# Altium PCB BB8_Control.PcbDoc
Units mil, origin at the board's own origin, x right, y up, seen from the top; angles counter-clockwise.
Board outline 3937.01 x 1968.5 mil, 2 copper layers (Top Layer, Bottom Layer); 63 components, 43 nets, 242 pads, 44 vias.
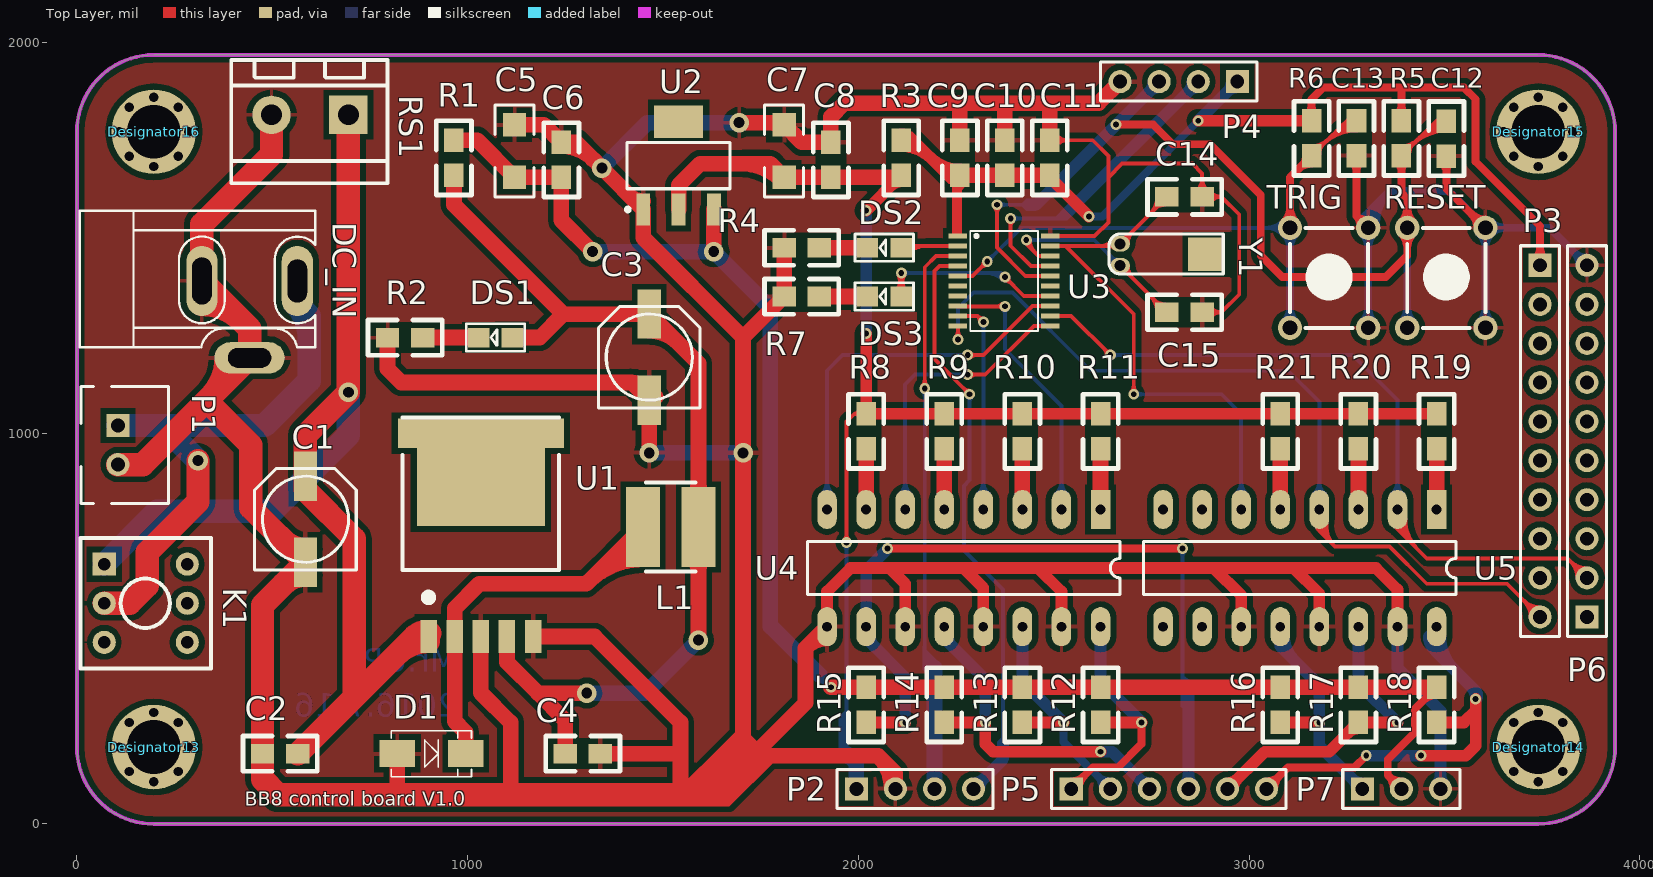
[diagram p0: Top Layer view]
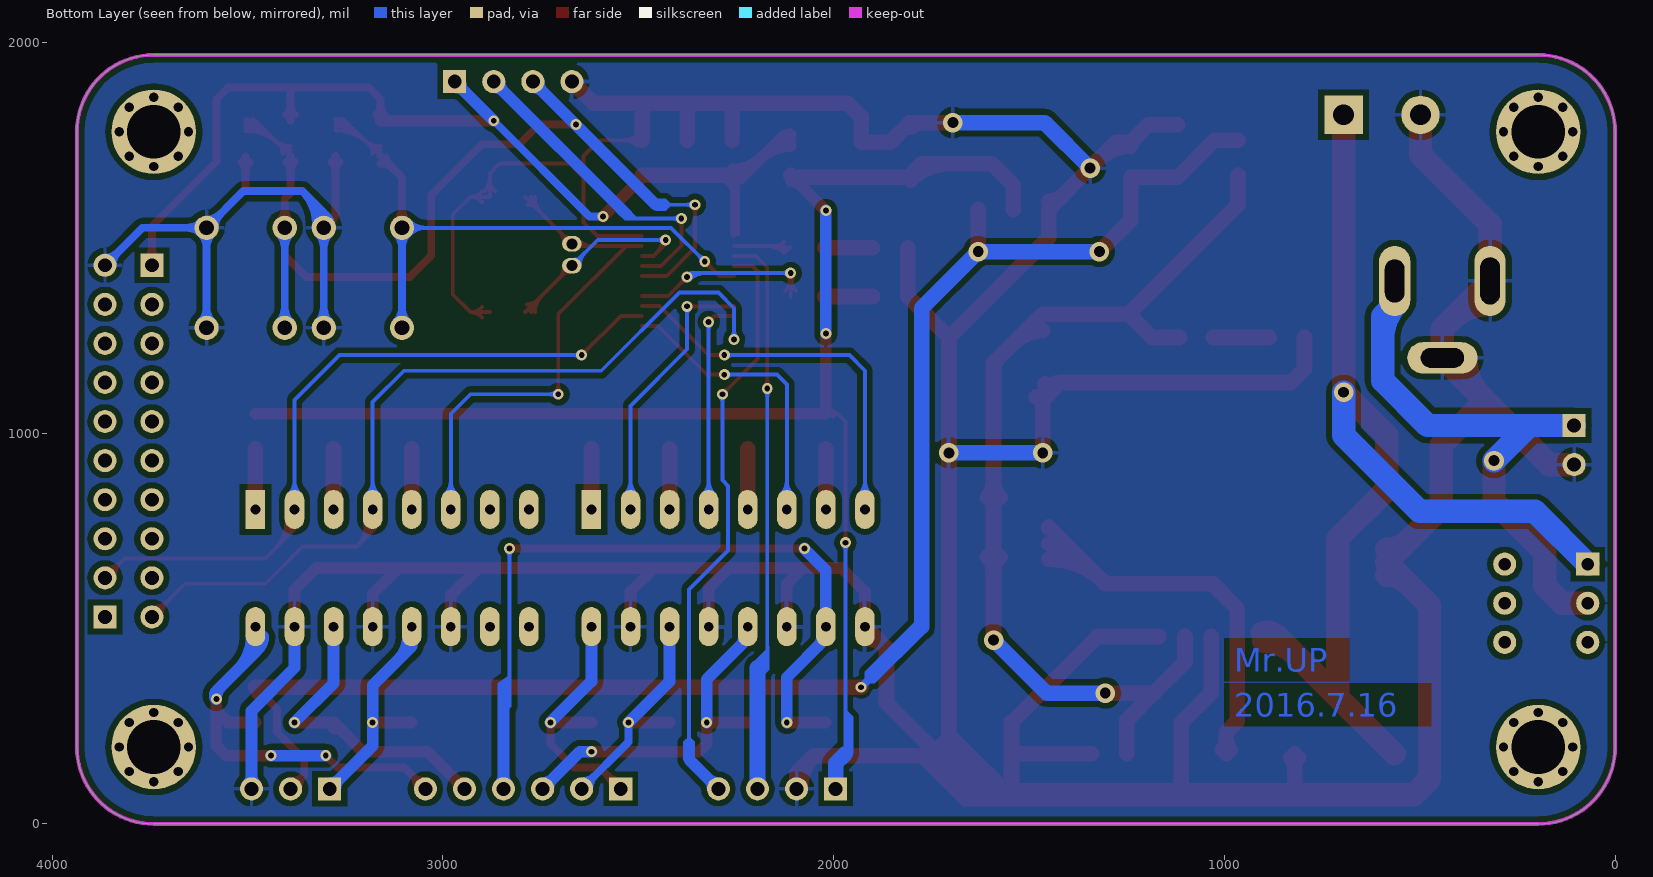
[diagram p1: Bottom Layer view, seen from below]

## Layer stack, top to bottom
Top Layer: signal copper 1.4
Dielectric: dielectric 12.6, FR-4, Dk 4.8
Bottom Layer: signal copper 1.4

## Board outline
196.85,0 cw(c196.85,196.85) 0,196.85 0,1771.65 cw(c196.85,1771.65) 196.85,1968.5 3740.16,1968.5 cw(c3740.16,1771.65) 3937.01,1771.65 3937.01,196.85 cw(c3740.16,196.85) 3740.16,0

## Design rules (kind name [scope] priority, off if disabled: settings)
Clearance polygon [InPolygon] p1: gap=15
Clearance [All] p2: gap=10
PolygonConnect [All] p1: connectstyle=Relief reliefconductorwidth=10 reliefentries=4 polygonreliefangle="90 Angle"
RoutingVias [All] p1: holewidth=15 width=28 viastyle="Through Hole" minholewidth=12 minwidth=20 maxholewidth=50 maxwidth=50
SilkscreenOverComponentPads [All] p1: minsilkscreentomaskgap=10
SolderMaskExpansion [All] p1: expansion=4
Width [All] p1: maxlimit=200 minlimit=10 preferedwidth=10 minimp=50.000000 maximp=50.000000 favimp=50.000000
27 further rules are at their usual default settings.

## Classes and differential pairs
component class Power: C1 C2 C3 C4 C5 C6 C7 C8 C9 C10 C11 D1 DC_IN DS1 K1 L1 P1 R1 R2 R3 RS1 U1 U2
component class MainControl: C12 C13 C14 C15 DS2 DS3 P2 P3 P4 P5 P6 P7 R4 R5 R6 R7 R8 R9 R10 R11 R12 R13 R14 R15 R16 R17 R18 R19 R20 R21 RESET TRIG U3 U4 U5 Y1

## Components (designator, comment, footprint, x,y, rotation, side; value= is the part's Value field where it differs from the comment)
C1 "220uF" CC6.56.5 585,780 r270 top
C2 "104" 0805 475,180.06 r0 top
C3 "220uF" CC6.56.5 1465,1195 r270 top
C4 "104" 0805 1340,180.06 r180 top
C5 "10uF" 1206 1120,1790 r270 top
C6 "104" 0805 1240,1745 r270 top
C7 "10uF" 1206 1810,1790 r270 top
C8 "104" 0805 1930,1745 r270 top
C9 "104" 0805 2260,1750 r270 top
C10 "104" 0805 2375,1750 r270 top
C11 "104" 0805 2490,1750 r270 top
C12 "104" 0805 3505,1709.09 r90 top
C13 "104" 0805 3275,1710 r90 top
C14 "104" 0805 2790,1605 r0 top
C15 "104" 0805 2790,1310 r0 top
D1 "1N5824" DIODE_3*5.3 910,180 r0 top
DC_IN "Charging Port" DC10B 145,1220 r0 top (schematic designator DC_IN1)
Designator13 "Comment" M3-3.5-5.5 196.85,196.85 r0 top
Designator14 "Comment" M3-3.5-5.5 3740.16,196.85 r0 top
Designator15 "Comment" M3-3.5-5.5 3740.16,1771.65 r0 top
Designator16 "Comment" M3-3.5-5.5 196.85,1771.65 r0 top
DS1 "LED1" SMDLED 1115,1245 r180 top
DS2 "LED1" SMDLED 2110,1475 r180 top
DS3 "LED1" SMDLED 2110,1350 r180 top
K1 "BUTTON" BTN8.5*8.5 70,665 r0 top
L1 "33uH" CD54 1449.13,760 r0 top
P1 "DC 7.4V" XH2.54-2P 105,1020 r270 top
P2 "Header 4" HDR1X4 1995,90 r0 top
P3 "Header 10" HDR1X10 3745,1430 r270 top
P4 "Header 4" HDR1X4 2970,1900 r180 top
P5 "Header 6" HDR1X6 2545,90 r0 top
P6 "Header 10" HDR1X10 3865,530 r90 top
P7 "Header 3" HDR1X3 3290,90 r0 top
R1 "0R" 0805 965,1660 r90 top
R2 "1K" 0805 885,1245 r180 top
R3 "0R" 0805 2110,1660 r90 top
R4 "510R" 0805 1900,1475 r180 top
R5 "47K" 0805 3390,1710 r90 top
R6 "47K" 0805 3160,1710 r90 top
R7 "510R" 0805 1900,1350 r180 top
R8 "1K" 0805 2020,960 r90 top
R9 "1K" 0805 2220,960 r90 top
R10 "1K" 0805 2420,960 r90 top
R11 "1K" 0805 2620,960 r90 top
R12 "4.7K" 0805 2619.94,260 r90 top
R13 "4.7K" 0805 2420,260 r90 top
R14 "4.7K" 0805 2220,260 r90 top
R15 "4.7K" 0805 2020,260 r90 top
R16 "4.7K" 0805 3080,260 r90 top
R17 "4.7K" 0805 3280,260 r90 top
R18 "4.7K" 0805 3480,260 r90 top
R19 "1K" 0805 3480,960 r90 top
R20 "1K" 0805 3280,960 r90 top
R21 "1K" 0805 3080,960 r90 top
RESET "KEY_M" KEY_M 3405,1270 r90 top (schematic designator RESET1)
RS1 "to L298N" HEAD2L-0.8 695,1815 r180 top
TRIG "KEY_M" KEY_M 3105,1270 r90 top (schematic designator TRIG1)
U1 "LM2596" TO-263-5 900,480 r90 top
U2 "AMS1117-3.3" SOT223-4L 1540,1685 r90 top
U3 "MSP430G2x53" MSP430G2x53 2255,1505 r0 top
U4 "TLP521-4" DIP16 2620,805 r270 top
U5 "TLP521-4" DIP16 3480,805 r270 top
Y1 "32.768KHz" XTAL32 2670,1485 r0 top

## Footprints (in the part's own frame and the unit in brackets; to place one, negate y for a bottom-side part, rotate by r counter-clockwise, add the part's x,y. Pads: shape width x height; smd on the part's side, far side on the other; paste and mask are expansions set on the pad)
0805 [mil]
  rect 60x50 smd: 1(0,-0.06) 2(90,-0.06)
  silkscreen extent -50,-45 140,45
1206 [mil]
  rect 60x60 smd: 1(0,0) 2(135,0)
  silkscreen extent -50,-50 185,50
BTN8.5*8.5 [mm]
  rect 1.5x1.5 hole 0.8: 1(0,0)
  round 1.5 hole 0.8: 2(0,-2.54) 3(0,-5.08) 4(5.4,-5.08) 5(5.4,-2.54) 6(5.4,0)
  silkscreen extent -1.55,-6.79 6.95,1.71
CC6.56.5 [mm]
  rect 3.2x1.5 smd: 1(-2.794,0) 2(2.8,0)
  silkscreen extent -3.3,-3.3 3.3,3.3
CD54 [mm] "L_CD54"
  rect 2.2x5.2 smd: 1(0,0) 2(3.6,0)
  silkscreen extent 0.2,-2.9 3.4,2.9
DC10B [mil]
  oval 80x180 hole 50 slot 110 at 90 deg: 1(419.09,170)
  oval 80x180 hole 50 slot 120 at 90 deg: 2(175,170)
  oval 180x80 hole 50 slot 110 at 0 deg: 3(297.05,-26.85)
  silkscreen extent -138,0 465,350
DIODE_3*5.3 [mm]
  rect 2.3x1.75 smd: 1(-2.286,0) 2(2.159,0)
  silkscreen extent -2.67,-1.5 2.54,1.5
DIP16 [mil] "DIP16"
  rect 100x50 hole 25: 1(0,0)
  oval 100x50 hole 25: 2(0,-100) 3(0,-200) 4(0,-300) 5(0,-400) 6(0,-500) 7(0,-600) 8(0,-700) 9(300,-700) 10(300,-600) 11(300,-500) 12(300,-400) 13(300,-300) 14(300,-200) 15(300,-100) 16(300,0)
  silkscreen extent 82,-750 218,50
HDR1X3 [mm] "Connector; Header; 3 Position"
  rect 1.5x1.5 hole 0.9: 1(0,0)
  round 1.5 hole 0.9: 2(2.54,0) 3(5.08,0)
  silkscreen extent -1.27,-1.27 6.35,1.27
HDR1X4 [mm] "Connector; Header; 4 Position"
  rect 1.5x1.5 hole 0.9: 1(0,0)
  round 1.5 hole 0.9: 2(2.54,0) 3(5.08,0) 4(7.62,0)
  silkscreen extent -1.27,-1.27 8.89,1.27
HDR1X6 [mm] "Connector; Header; 6 Position"
  rect 1.5x1.5 hole 0.9: 1(0,0)
  round 1.5 hole 0.9: 2(2.54,0) 3(5.08,0) 4(7.62,0) 5(10.16,0) 6(12.7,0)
  silkscreen extent -1.27,-1.27 13.97,1.27
HDR1X10 [mm] "Connector; Header; 10 Position"
  rect 1.5x1.5 hole 0.9: 1(0,0)
  round 1.5 hole 0.9: 2(2.54,0) 3(5.08,0) 4(7.62,0) 5(10.16,0) 6(12.7,0) 7(15.24,0) 8(17.78,0) 9(20.32,0) 10(22.86,0)
  silkscreen extent -1.27,-1.27 24.13,1.27
HEAD2L-0.8 [mm]
  rect 2.5x2.5 hole 1.35: 1(0,0)
  round 2.5 hole 1.35: 2(5,0)
  silkscreen extent -2.54,-3.56 7.62,4.45
KEY_M [mil]
  round 62 hole 38: 1(0,0) 1(255.91,0) 2(0,-200) 2(255.91,-200)
  silkscreen extent 0,-200 255,0
M3-3.5-5.5 [mm]
  round 0.6 hole 0.6: 1(-2.25,0) 1(-1.59,-1.59) 1(-1.59,1.59) 1(0,-2.25) 1(0,2.25) 1(1.59,-1.59) 1(1.59,1.59) 1(2.25,0)
  round 5.5 hole 3.5: 1(0,0)
MSP430G2x53 [mm] "MSP430G2x53 TSSOP-20"
  rect 1.2x0.3 smd: 1(0,0) 2(0,-0.65) 3(0,-1.3) 4(0,-1.95) 5(0,-2.6) 6(0,-3.25) 7(0,-3.9) 8(0,-4.55) 9(0,-5.2) 10(0,-5.85) 11(6,-5.85) 12(6,-5.2) 13(6,-4.55) 14(6,-3.9) 15(6,-3.25) 16(6,-2.6) 17(6,-1.95) 18(6,-1.3) 19(6,-0.65) 20(6,0)
  silkscreen extent 0.8,-6.17 5.2,0.33
SMDLED [mm]
  rect 1.4x1.27 smd: 1(0.001,-0.002) 2(2.211,-0.002)
  silkscreen extent -0.8,-0.89 3.01,0.89
SOT223-4L [mm] "SOT223, 4-Leads, Body 6.5x3.5mm, Pitch 2.3mm, Lead Span 7mm, IPC High Density"
  rect 2.1x0.9 smd: 1(-2.85,2.3) 2(-2.85,0) 3(-2.85,-2.3)
  rect 2.1x3.2 smd: 4(2.85,0)
  silkscreen extent -2.97,-3.35 1.5,3.42, body extent -1.85,-3.35 1.85,3.35, height 1.7
TO-263-5 [mm] "LM2596 TO-263-5"
  rect 2.16x1.07 smd: 1(0,0) 2(0,-1.7) 3(0,-3.4) 4(0,-5.1) 5(0,-6.8)
  rect 5.08x8.33 smd: 6(9.72,-3.4)
  rect 1.91x10.8 smd: 6(13.215,-3.4)
  silkscreen extent 2.29,-8.48 14.22,1.68
XH2.54-2P [mm] "Connector; Header; 2 Position"
  rect 1.5x1.5 hole 0.9: 1(0,0)
  round 1.5 hole 0.9: 2(2.54,0)
  silkscreen extent -2.54,-2.4 5.08,3.3
XTAL32 [mil]
  oval 50x40 hole 28: 1(0,0) 2(0,-56)
  rect 92.13x86 smd: ""(220,-27)
  silkscreen extent -28,-77 264,25

## Part data
L1: library part L
P1: library part Header-2, "Header, 2-Pin"
P2 P4: "Header, 4-Pin"
P3 P6: "Header, 10-Pin"
P5: "Header, 6-Pin"
P7: "Header, 3-Pin"
U1: "LM2596 - 5.0"
U2: library part AMS1117
U3: "MSP430G2x53 microcontrollers"
U4 U5: "4 x 4-Pin Phototransistor Optocoupler"

## Via types
v1: diameter 28, hole 15, Top Layer to Bottom Layer, 34 vias
v2: diameter 50, hole 28, Top Layer to Bottom Layer, 10 vias

## Nets (pads, with @x,y where several pads share a name; then routed paths per layer and width w, separated by ;. In a path a pad name is that pad's centre, name@x,y a point inside that pad or via, vN(x,y) a via of type N, cw(c..) or ccw(c..) an arc to the next point about the centre after c; other vN are vias at no path point)
3.3V: C7.2 C8.2 P2.1 R3.1 R8.2 R9.2 R10.2 R11.2 R19.2 R20.2 R21.2 U2.2 | length 4019.7
  Top Layer w10: v1@1963.64,726.36 ccw(c1948.27,741.73) 1970,741.73 ccw(c1991.73,741.73) v1@1976.36,726.36 ; v1(1970,720) 1970,1030 1990,1050 ; R8.2@2001.62,1042.27 ccw(c1990,1037.41) 1990,1050 ; R8.2@2001.62,1057.73 cw(c1990,1062.59) 1990,1050 ; v1(2020,1255) v1@2020.06,1254.94 ; v1(2020,1570) v1(2020,1570) ; R8.2 1990,1050
  Top Layer w30: v1@2020.06,1254.94 R8.2 R9.2 R10.2 R11.2 R21.2 R20.2 R19.2 ; v1(2020,1570) R3.1@2105.06,1655 ; 2084.46,1634.39 cw(c2110.06,1608.79) R3.1@2110.06,1645
  Top Layer w40: U2.2 1540,1635 1595,1690 1775,1690 C7.2 2105.06,1655 R3.1 ; 1701.36,1690 cw(c1701.36,1546.36) C7.2@1802.93,1647.93
  Bottom Layer w10: v1@1963.64,713.64 cw(c1948.27,698.27) 1970,698.27 cw(c1991.73,698.27) v1@1976.36,713.64 ; 1970,180 v1(1970,720)
  Bottom Layer w30: v1(2020,1255) v1(2020,1570)
  Bottom Layer w40: 1970,180 1995,155 P2.1
5.0V: C5.2 C6.2 P7.2 R1.2 R12.2 R13.2 R14.2 R15.2 R16.2 R17.2 R18.2 U2.3 | length 4202
  Top Layer w20: P7.2@3370.47,90 ccw(c3323.33,90) 3356.66,123.34 ccw(c3390,156.67) P7.2@3390,109.53 ; P7.2 3355,125 3355,165 3425,235 3425,294.94 R18.2 ; 3445.92,315.86 cw(c3480.06,281.72) R18.2@3480.06,330 ; R18.2@3457.99,327.93 ccw(c3440.92,345) R18.2@3465.06,345
  Top Layer w40: R1.2 1025,1750 C5.2 C6.2 1239.94,1545.06 v2(1320,1465) ; v2(1630,1465) 1630,1572.24 U2.3 ; v1(1930,350) R15.2 R14.2 R13.2 R12.2 R16.2 R17.2 R18.2
  Bottom Layer w20: 1775,505 v1(1930,350)
  Bottom Layer w40: v2(1320,1465) v2(1630,1465) 1775,1320 1775,505
5.0V_IN: C3.1 C4.2 DS1.1 L1.2 R1.1 U1.4 | length 2821.3
  Top Layer w40: R1.1 965.06,1584.94 1242.5,1307.5 ; U1.4 1100.79,414.21 1180,335 ; DS1.1 1185.06,1245.06 1245,1305 C3.1 1590.87,1179.13 L1.2 v2(1590.87,470.87) ; C4.2 1250,265 1180,335 ; v2(1305,335) 1180,335 ; C3.1@1465,1262.01 cw(c1465,1158.22) 1538.39,1231.61 ; C3.1@1465,1302.01 cw(c1465,1294.78) C3.1@1470.11,1299.89 ; L1.2@1574.39,684.46 cw(c1534.6,644.68) 1590.87,644.68 cw(c1647.13,644.68) L1.2@1607.35,684.46 ; L1.2@1574.39,835.54 ccw(c1534.6,875.32) 1590.87,875.32 ccw(c1647.13,875.32) L1.2@1607.35,835.54
  Bottom Layer w40: v2(1305,335) 1455,335 v2(1590.87,470.87)
7.4V: C1.1 C2.2 K1.1 RS1.1 U1.1 | length 3049.6
  Top Layer w40: 865,480 U1.1
  Top Layer w60: C2.2 865,480 cw(c890.6,454.4) U1.1@903.08,488.39 ; RS1.1 v2(695,1105) 585,995 C1.1 585,855 710,730 710,325 ; 818.88,433.88 cw(c900,352.76) U1.1@900,467.48
  Bottom Layer w60: K1.1 205,800 500,800 695,995 v2(695,1105)
7.4V_IN: DC_IN.1 K1.2 P1.1 | length 1537
  Top Layer w60: K1.2 135,565 180,610 180,695 310,825 v2(310,930)
  Bottom Layer w60: P1.1 220,1020 ; v2(310,930) 220,1020 ; DC_IN.1@557.02,1332.93 cw(c465.34,1241.24) 595,1241.24 ; DC_IN.1 564.09,1330.91 595,1300 595,1135 480,1020 220,1020
DVCC: C9.2 C10.2 C11.2 P3.1 P4.1 R3.2 R5.2 R6.2 U3.1 | length 3189.8
  Top Layer w10: C9.2@2245.79,1640.86 cw(c2223.57,1618.63) 2255,1618.63 ; U3.1 2255,1655.06 C9.2 ; 2255,1594.8 cw(c2320.14,1594.8) C9.2@2274.08,1640.86 ; 2255,1618.94 cw(c2295.99,1618.94) C9.2@2267.01,1647.93 ; C11.2@2489.94,1655.06 C11.2
  Top Layer w20: R6.2@3149.46,1815.61 ccw(c3123.85,1841.21) 3160.06,1841.21 ccw(c3196.28,1841.21) R6.2@3170.67,1815.61 ; R6.2 3160.06,1855.06 3190,1885 3390.06,1885 ; R5.2@3379.46,1815.61 ccw(c3353.85,1841.21) 3390.06,1841.21 ccw(c3426.28,1841.21) R5.2@3400.67,1815.61 ; 3390,1885 3550,1885 3580,1855 3580,1695 3745,1530 P3.1 ; R5.2 3390.06,1884.94 ; P3.1@3731.19,1443.81 ccw(c3697.86,1477.14) 3745,1477.14 ccw(c3792.14,1477.14) P3.1@3758.81,1443.81
  Top Layer w30: R3.2@2110.06,1735 cw(c2110.06,1626.51) 2186.77,1703.23 ; R3.2 2140,1750 2230,1660 C9.2 ; R3.2@2110.06,1765 cw(c2110.06,1728.94) 2135.56,1754.44 ; 2183.23,1706.77 ccw(c2259.94,1783.49) C9.2@2259.94,1675 ; 2234.44,1655.56 ccw(c2259.94,1681.06) C9.2@2259.94,1645 ; C11.2@2489.94,1655.06 v1(2590,1555) ; v1(2870,1800) R6.2
  Top Layer w40: C9.2 C10.2 C11.2
  Bottom Layer w20: v1(2590,1555) 2625,1555 v1(2870,1800)
  Bottom Layer w30: v1(2870,1800) P4.1 ; P4.1@2955.47,1900 cw(c2920.4,1900) 2945.2,1875.2 cw(c2970,1850.4) P4.1@2970,1885.47
DVSS: C1.2 C2.1 C3.2 C4.1 C5.1 C6.1 C7.1 C8.1 C9.1 C10.1 C11.1 C12.1 C13.1 C14.2 C15.2 D1.1 DC_IN.2 DC_IN.3 P1.2 P2.2 P4.4 P6.10 P7.3 R2.2 R4.2 R7.2 RESET.2 RS1.2 TRIG.2 U1.3 U1.5 U2.1 U3.20 U4.9 U4.11 U4.13 U4.15 U5.11 U5.13 U5.15 | length 19280
  Top Layer w10: C11.1 2600,1750 2640,1710 2640,1540 2605,1505 U3.20 ; C11.1@2504.08,1735.86 cw(c2538.22,1701.72) 2538.22,1750 cw(c2538.22,1798.28) C11.1@2504.08,1764.14 ; 2640,1655 2675,1690 2855,1690 2880,1665 C14.2 2880,1605 2930,1605 ; C14.2@2865.86,1619.08 ccw(c2831.72,1653.22) 2880,1653.22 ccw(c2928.28,1653.22) C14.2@2894.14,1619.08 ; C15.2 2929.94,1309.94 ; C14.2@2899.81,1618.37 ccw(c2930,1645.75) 2930,1605 ; C15.2@2899.86,1296.55 cw(c2929.93,1269.46) 2929.93,1309.94 ; C15.2@2899.86,1323.32 ccw(c2929.93,1350.41) 2929.93,1309.94 ; C14.2@2899.88,1591.57 cw(c2930,1564.51) 2930,1605 ; 2929.94,1309.94 2975,1355 2975,1560 2930,1605
  Top Layer w20: C13.1@3264.46,1694.39 cw(c3238.85,1668.79) 3275.06,1668.79 cw(c3311.28,1668.79) C13.1@3285.67,1694.39 ; C13.1@3275.06,1709.94 3275.06,1555.84 ; TRIG.2@3284.19,1528.74 ccw(c3252.32,1533.09) 3275.07,1555.84 ; TRIG.2@3302.16,1546.71 cw(c3297.81,1578.59) 3275.07,1555.84 ; TRIG.2@3305,1525.91 3275.06,1555.84 ; C12.1@3494.46,1693.49 cw(c3468.85,1667.88) 3505.06,1667.88 cw(c3541.28,1667.88) C12.1@3515.67,1693.49 ; C12.1 3505.06,1625.84 RESET.2@3605,1525.91 ; RESET.2@3584,1525.91 ccw(c3533.3,1525.91) 3569.15,1561.75 ccw(c3605,1597.6) RESET.2@3605,1546.91
  Top Layer w30: U4.9 1920,595 1980,655 2080,655 ; U4.11 2120,615 2080,655 ; U4.13 2320,605 2270,655 ; U4.15 2520,595 2460,655 ; U5.11 2980,585 2910,655 ; U5.13 3180,590 3115,655 ; U5.15 3380,600 3325,655 3115,655 ; 2080,655 2270,655 ; 2270,655 2460,655 ; 2460,655 2910,655 ; 2910,655 3115,655
  Top Layer w40: R2.2 795,1165 830,1130 1419.76,1130 ; D1.1@809.78,169.78 cw(c785.12,145.12) 820,145.12 cw(c854.88,145.12) D1.1@830.22,169.78 ; 820,75 D1.1 ; U1.3 1033.86,336.14 1110,260 1110,75 ; C5.1 1194.94,1790 C6.1 1277.24,1745 v2(1343.62,1678.62) U2.1 1449.45,1500.55 1705,1245 ; U1.5 1325,480 1545,260 1545,85 ; C6.1@1239.94,1735 cw(c1239.94,1620.79) 1320.7,1701.55 ; C4.1 1540.13,180.13 ; 1413.02,1609.22 ccw(c1449.45,1645.65) U2.1@1449.45,1594.13 ; 1413.58,1130 cw(c1413.58,1066.81) C3.2@1458.26,1111.49 ; C3.2@1454.12,1095.65 ccw(c1469.7,1111.24) C3.2@1482.01,1092.95 ; C3.2@1457.66,1112.16 ccw(c1419.77,1080.84) 1419.77,1130 ; C3.2@1459.68,1126.13 cw(c1442.07,1152.3) 1419.76,1130 ; v2(1465,950) C3.2 1419.76,1130 ; 1630,75 1865,310 1865,450 U4.9 ; v2(1695,1795) 1805,1795 C7.1 1855,1745 C8.1 1929.94,1809.94 1965,1845 2260,1845 ; 1773.79,1795 cw(c1773.79,1753.79) C7.1@1802.93,1782.93 ; R4.2 R7.2 R7.2 1705,1245 ; 1868.79,453.79 cw(c1920,402.57) U4.9@1920,475 ; 2050.45,174.55 cw(c1965.9,90) P2.2@2085.47,90 ; P2.2 2095,130 2050,175 1705,175 v2(1705,950) 1705,1245 ; C9.1 2259.94,1844.94 2260,1845 ; C10.1 2374.94,1840.06 2370,1845 ; C11.1 2489.94,1845 ; P4.4 2615,1845 2370,1845 ; 2260,1845 2370,1845 ; 1319.82,1702.05 cw(c1299.46,1666.79) 1338.79,1677.33 ccw(c1299.46,1666.79) 1319.82,1702.05
  Top Layer w60: P1.2 168.9,920 331.95,1083.05 ; DC_IN.2@320,1330 cw(c320,1185.15) 422.43,1287.57 ; 339.62,1090.72 ccw(c237.2,1193.15) DC_IN.3@382.05,1193.15 ; RS1.2 498.15,1713.15 320,1535 DC_IN.2 442.05,1267.95 DC_IN.3 331.95,1083.05 ; 528.68,613.44 cw(c585,557.12) C1.2@585,636.77 ; 528.68,726.08 ccw(c585,782.41) C1.2@585,702.76 ; 1630,75 820,75 515,75 475,115 C2.1 475,559.76 C1.2 445,809.76 445,970 331.95,1083.05
  Bottom Layer w20: TRIG.2@3286.06,1524.4 cw(c3329.54,1527.85) 3298.7,1558.7 ; TRIG.2@3290.15,1284.85 ccw(c3254.3,1320.7) 3305,1320.7 ccw(c3355.7,1320.7) TRIG.2@3319.85,1284.85 ; TRIG.2@3290.15,1511.06 cw(c3254.3,1475.21) 3305,1475.21 cw(c3355.7,1475.21) TRIG.2@3319.85,1511.06 ; TRIG.2@3293.41,1543.41 ccw(c3279.11,1565) 3305,1565 ; TRIG.2@3305,1270 3305,1525.91 3305,1565 ; TRIG.2@3306,1525.98 cw(c3386.33,1532.36) 3329.35,1589.35 ; TRIG.2@3316.59,1543.41 cw(c3330.89,1565) 3305,1565 ; TRIG.2@3325.93,1527.57 cw(c3443.12,1536.87) 3360,1620 ; RESET.2@3584,1525.91 ccw(c3533.3,1525.91) 3569.15,1561.75 ccw(c3605,1597.6) RESET.2@3605,1546.91 ; RESET.2@3590.15,1284.85 ccw(c3554.3,1320.7) 3605,1320.7 ccw(c3655.7,1320.7) RESET.2@3619.85,1284.85 ; RESET.2@3590.15,1511.06 cw(c3554.3,1475.21) 3605,1475.21 cw(c3655.7,1475.21) 3619.85,1511.06 cw(c3655.7,1475.21) 3655.7,1525.91 cw(c3655.7,1576.6) RESET.2@3619.85,1540.75 ; RESET.2@3605,1270 RESET.2@3605,1525.91 ; P6.10@3845.47,1430 ccw(c3798.33,1430) 3831.66,1463.34 ccw(c3865,1496.67) P6.10@3865,1449.53 ; P6.10 3769.09,1525.91 RESET.2@3605,1525.91 ; 3305,1565 3360,1620 ; 3360,1620 3510.91,1620 RESET.2@3605,1525.91
  Bottom Layer w30: U5.15 3380,400 3490,290 P7.3 ; P7.3@3479.73,100.27 ccw(c3454.93,125.07) 3490,125.07 ccw(c3525.07,125.07) P7.3@3500.27,100.27
  Bottom Layer w40: v2(1343.62,1678.62) 1460,1795 v2(1695,1795) ; v2(1465,950) v2(1705,950)
NetD1_2: D1.2 L1.1 U1.2 | length 1247.7
  Top Layer w40: D1.2@984.78,190.22 ccw(c960.12,214.88) 995,214.88 ccw(c1029.88,214.88) D1.2@1005.22,190.22 ; D1.2 995,235 966.93,263.07 U1.2 966.93,551.93 1030,615 1304.13,615 L1.1 ; 1308.53,619.4 cw(c1449.13,478.8) L1.1@1449.13,677.64 ; 1376.82,687.68 cw(c1449.13,615.37) L1.1@1449.13,717.64 ; L1.1@1445.1,755.97 cw(c1449.13,751.93) L1.1@1449.13,757.64
NetDS1_2: DS1.2 R2.1 | length 143
  Top Layer w40: R2.1 DS1.2
NetDS2_2: DS2.2 R4.1 | length 123
  Top Layer w40: R4.1 DS2.2
NetDS3_2: DS3.2 R7.1 | length 123
  Top Layer w40: R7.1 DS3.2
NetP5_1: P5.1 R12.1 U4.16 | length 760.2
  Top Layer w10: P5.1@2535,90 P5.1
  Top Layer w20: P5.1 2600,145 2665,145 2725,205 v1(2725,260) ; P5.1@2545,109.53 ccw(c2545,156.67) 2578.34,123.34 ccw(c2611.67,90) P5.1@2564.53,90
  Top Layer w30: R12.1 v1(2725,260)
  Bottom Layer w30: U4.16 2620,365 v1(2725,260)
NetP5_2: P5.2 R13.1 U4.14 | length 687.2
  Top Layer w30: R13.1 v1(2525,260)
  Bottom Layer w20: v1(2525,260) 2525,210 P5.2 ; P5.2@2625.47,90 ccw(c2578.33,90) 2611.66,123.34 ccw(c2645,156.67) P5.2@2645,109.53
  Bottom Layer w30: U4.14 2420,365 v1(2525,260)
NetP5_3: P5.3 R14.1 U4.12 | length 1034.6
  Top Layer w10: U4.12@2220,470 U4.12
  Top Layer w30: R14.1 v1(2325,260) 2325,205 2345,185 v1(2620,185)
  Bottom Layer w30: U4.12 2220,475 2325,370 v1(2325,260) ; U4.12@2230,480 ccw(c2266.21,480) 2240.61,454.39 ; v1(2620,185) 2650,185 P5.3 ; P5.3@2730.47,90 ccw(c2695.4,90) 2720.2,114.8 ccw(c2745,139.6) P5.3@2745,104.53
NetP5_4: P5.4 R15.1 U4.10 | length 2103
  Top Layer w20: v1(2075,705) v1(2830,705)
  Top Layer w30: R15.1 v1(2120,260)
  Bottom Layer w10: v1@2823.64,698.64 cw(c2808.27,683.27) 2830,683.27 cw(c2851.73,683.27) v1@2836.36,698.64 ; v1(2830,705) 2830,360 2845,345
  Bottom Layer w30: U4.10@2030,480 ccw(c2066.21,480) 2040.61,454.39 ; v1(2075,705) 2020,650 U4.10 2020,475 2120,375 v1(2120,260) ; P5.4@2834.73,100.27 ccw(c2809.93,125.07) 2845,125.07 ccw(c2880.07,125.07) P5.4@2855.27,100.27 ; P5.4 2845,345
NetP5_5: P5.5 R17.1 U5.14 | length 875.4
  Top Layer w30: P5.5 3040,185 3205.06,185 R17.1 v1(3380,260) ; P5.5@2945,104.53 ccw(c2945,139.6) 2969.8,114.8 ccw(c2994.6,90) P5.5@2959.53,90 ; 3254.46,234.39 cw(c3280.06,208.79) R17.1@3280.06,245
  Bottom Layer w30: U5.14 3280,360 v1(3380,260)
NetP5_6: P5.6 R18.1 U5.16 | length 1304.9
  Top Layer w20: P5.6 3100,145 3270,145 v1(3300,175) ; P5.6@3045,109.53 ccw(c3045,156.67) 3078.34,123.34 ccw(c3111.67,90) P5.6@3064.53,90
  Top Layer w30: v1(3440,175) 3555,175 3580,200 3580,290 ; R18.1 3550,260 3580,290 ; v1(3580,320) 3580,290
  Bottom Layer w30: v1(3300,175) v1(3440,175) ; U5.16@3460,480 ccw(c3508.28,480) 3474.14,445.86 ; U5.16 3480,440 3580,340 ; U5.16@3490,480 ccw(c3610.71,480) 3525.36,394.64 ; 3567.56,352.44 cw(c3535.13,320) v1@3581,320 ; v1(3580,320) 3580,340 ; v1@3580.76,319.35 ccw(c3569.27,329.27) 3580,340
NetP7_1: P7.1 R16.1 U5.12 | length 723.4
  Top Layer w30: R16.1 v1(3180,260)
  Bottom Layer w30: U5.12 3080,455 3180,355 v1(3180,260) 3180,200 P7.1 ; U5.12@3090,480 ccw(c3174.5,480) 3114.75,420.25 ; P7.1@3275.47,90 ccw(c3240.4,90) 3265.2,114.8 ccw(c3290,139.6) P7.1@3290,104.53
NetR8_1: R8.1 U4.7 | length 155
  Top Layer w10: R8.1@2020,959.94 R8.1
  Top Layer w40: U4.7 R8.1@2020,959.94
NetR9_1: R9.1 U4.5 | length 155
  Top Layer w10: R9.1@2220,959.94 R9.1
  Top Layer w40: U4.5 R9.1@2220,959.94
NetR10_1: R10.1 U4.3 | length 155
  Top Layer w10: R10.1@2420,959.94 R10.1
  Top Layer w40: U4.3 R10.1@2420,959.94
NetR11_1: R11.1 U4.1 | length 155
  Top Layer w10: R11.1@2620,959.94 R11.1
  Top Layer w40: U4.1 R11.1@2620,959.94
NetR19_1: R19.1 U5.1 | length 155
  Top Layer w10: U5.1 U5.1
  Top Layer w40: U5.1 R19.1
NetR20_1: R20.1 U5.3 | length 155
  Top Layer w10: U5.3 U5.3
  Top Layer w40: U5.3 R20.1
NetR21_1: R21.1 U5.5 | length 154.9
  Top Layer w40: U5.5 R21.1
P1.0: DS2.1 U3.2 | length 275.1
  Top Layer w10: DS2.1 2135.06,1475.06 2139.41,1479.41 ; DS2.1@2119.6,1467.99 cw(c2147.16,1440.43) 2147.16,1479.41 ; DS2.1@2126.67,1460.92 cw(c2171.3,1416.29) 2171.3,1479.41 ; DS2.1@2126.67,1489.21 ccw(c2150.32,1512.86) 2150.32,1479.41 ; DS2.1@2129.92,1484.93 ccw(c2139.41,1490.32) 2139.41,1479.41 ; DS2.1@2132.43,1473.09 cw(c2139.41,1472.4) 2139.41,1479.41 ; U3.2 2139.41,1479.41
P1.1: P2.3 U3.3 | length 1510.6
  Top Layer w10: v1@2163.64,1121.36 ccw(c2148.27,1136.73) 2170,1136.73 ccw(c2191.73,1136.73) v1@2176.36,1121.36 ; v1(2170,1115) 2170,1425 2198.82,1453.82 U3.3
  Bottom Layer w10: v1@2163.64,1108.64 cw(c2148.27,1093.27) 2170,1093.27 cw(c2191.73,1093.27) v1@2176.36,1108.64 ; v1(2170,1115) 2170,425 2195,400
  Bottom Layer w40: P2.3 2195,400
P1.2: P2.4 U3.4 | length 1629.8
  Top Layer w10: U3.4 2208.23,1428.23 2195,1415 2195,1190 v1(2285,1100) ; v1@2276,1100 ccw(c2254.27,1100) 2269.64,1115.36 ccw(c2285,1130.73) v1@2285,1109
  Bottom Layer w10: v1@2278.64,1093.64 cw(c2263.27,1078.27) 2285,1078.27 cw(c2306.73,1078.27) v1@2291.36,1093.64 ; v1(2285,1100) 2285,880 2270,865 2270,700 2370,600 2370,165
  Bottom Layer w30: P2.4 2370,165 ; P2.4@2295,104.53 ccw(c2295,139.6) 2319.8,114.8 ccw(c2344.6,90) P2.4@2309.53,90
P1.3: C13.2 R6.1 TRIG.1 U3.5 | length 2424.5
  Top Layer w10: U3.5 2292.64,1402.64 v1(2330,1440) ; v1@2321,1440 cw(c2299.27,1440) 2314.64,1424.64 cw(c2330,1409.27) v1@2330,1431 ; R6.1 3250.03,1799.97 ; R6.1@3160.06,1725 ccw(c3160.06,1761.21) 3185.67,1735.61 ; R6.1@3160.06,1735 ccw(c3160.06,1795.36) 3202.74,1752.68 ; R6.1@3180.06,1715 cw(c3216.28,1715) 3190.67,1740.61 ; 3189.71,1739.64 cw(c3275.06,1654.29) C13.2@3275.06,1775 ; 3206.78,1756.72 cw(c3275.06,1688.43) C13.2@3275.06,1785 ; 3223.85,1773.79 cw(c3275.06,1722.57) C13.2@3275.06,1795 ; 3240.92,1790.86 cw(c3275.06,1756.72) C13.2@3275.06,1805 ; C13.2@3255.56,1795.56 ccw(c3250.03,1794.29) 3250.03,1799.97 ; C13.2@3255.55,1804.38 cw(c3250.03,1805.62) 3250.03,1799.97 ; C13.2@3275.03,1799.97 3250.03,1799.97
  Top Layer w20: TRIG.1@3090.15,1540.75 ccw(c3054.3,1576.6) 3105,1576.6 ccw(c3155.7,1576.6) TRIG.1@3119.85,1540.75 ; TRIG.1@3105,1525.91 3105,1654.94 R6.1 ; 3125.92,1675.86 cw(c3160.06,1641.72) R6.1@3160.06,1690 ; R6.1@3137.99,1687.93 ccw(c3120.92,1705) R6.1@3145.06,1705
  Bottom Layer w10: v1(2330,1440) 2415.91,1525.91 TRIG.1@3105,1525.91 ; v1@2330,1449 ccw(c2330,1470.73) 2345.36,1455.36 ccw(c2360.73,1440) v1@2339,1440 ; TRIG.1@3086.62,1507.52 ccw(c3042.23,1463.14) 3042.23,1525.91 ccw(c3042.23,1588.68) TRIG.1@3086.62,1544.29 ; TRIG.1@3093.69,1514.59 ccw(c3066.37,1487.28) 3066.37,1525.91 ccw(c3066.37,1564.53) TRIG.1@3093.69,1537.22
  Bottom Layer w20: TRIG.1@3090.15,1284.85 ccw(c3054.3,1320.7) 3105,1320.7 ccw(c3155.7,1320.7) TRIG.1@3119.85,1284.85 ; TRIG.1@3090.15,1511.06 cw(c3054.3,1475.21) 3105,1475.21 cw(c3155.7,1475.21) TRIG.1@3119.85,1511.06 ; TRIG.1@3105,1270 TRIG.1@3105,1525.91
P1.4: U3.6
P1.5: U3.7
P1.6: DS3.1 U3.14 | length 780.7
  Top Layer w10: DS3.1@2095.83,1364.21 ccw(c2061.68,1398.35) 2109.97,1398.35 ccw(c2158.25,1398.35) DS3.1@2124.11,1364.21 ; v1@2102.21,1405.5 cw(c2074.56,1389.54) 2105.39,1381.28 ; v1@2103.64,1403.64 cw(c2088.35,1388.35) 2109.97,1388.35 ; v1@2105.5,1402.21 cw(c2099.84,1392.4) 2110.78,1395.33 ; 2109.12,1395.2 cw(c2120.27,1392.21) v1@2114.5,1402.21 ; DS3.1 v1@2109.97,1409.97 ; 2109.97,1388.19 cw(c2131.81,1388.19) v1@2116.36,1403.64 ; 2114.58,1381.12 cw(c2145.62,1389.44) v1@2117.79,1405.5 ; v1@2375,1391 cw(c2375,1369.27) 2390.36,1384.64 cw(c2405.73,1400) v1@2384,1400 ; v1(2375,1400) 2423.54,1351.46 U3.14
  Bottom Layer w10: v1(2110,1410) 2365,1410 v1(2375,1400) ; v1@2116.36,1403.64 cw(c2131.73,1388.27) 2131.73,1410 cw(c2131.73,1431.73) v1@2116.36,1416.36 ; 2329.13,1410 cw(c2329.13,1354.13) v1@2368.64,1393.64 ; 2353.27,1410 cw(c2353.27,1378.27) v1@2375.71,1400.71
P1.7: U3.15
P2.0: U3.8 U4.2 | length 844.5
  Top Layer w10: U3.8 2255.87,1325 v1(2375,1325) ; v1@2368.64,1318.64 ccw(c2353.27,1303.27) 2353.27,1325 ccw(c2353.27,1346.73) v1@2368.64,1331.36
  Bottom Layer w10: v1@2368.64,1318.64 cw(c2353.27,1303.27) 2375,1303.27 cw(c2396.73,1303.27) v1@2381.36,1318.64 ; v1(2375,1325) 2375,1215 2520,1070 U4.2 ; U4.2@2505.86,844.14 ccw(c2471.72,878.28) 2520,878.28 ccw(c2568.28,878.28) U4.2@2534.14,844.14
P2.1: U3.9 U4.4 | length 694.2
  Top Layer w10: U3.9 2255.28,1300 2305,1300 ; v1@2311,1285.15 ccw(c2290.51,1285.51) 2305,1300 ; v1@2319.85,1294 cw(c2319.49,1314.49) 2305,1300 ; v1(2320,1285) 2305,1300
  Bottom Layer w10: U4.4@2305.86,844.14 ccw(c2271.72,878.28) 2320,878.28 ccw(c2368.28,878.28) U4.4@2334.14,844.14 ; v1@2313.64,1278.64 cw(c2298.27,1263.27) 2320,1263.27 cw(c2341.73,1263.27) v1@2326.36,1278.64 ; U4.4 v1(2320,1285)
P2.2: P3.10 U3.10 U5.4 | length 2693.5
  Top Layer w10: v1@2248.64,1246.36 ccw(c2233.27,1261.73) 2255,1261.73 ccw(c2276.73,1261.73) v1@2261.36,1246.36 ; v1(2255,1240) U3.10 ; U5.4@3170.18,781.88 ccw(c3205.12,775.19) 3179.96,750.04 ; U5.4@3172.31,761.54 cw(c3167.5,750) 3180,750 ; U5.4@3180,780 ccw(c3227.52,770.9) 3193.31,736.69 ; U5.4 3180,750 ; U5.4@3187.69,761.54 ccw(c3192.5,750) 3180,750 ; U5.4@3189.82,778.12 ccw(c3249.92,766.62) 3206.65,723.35 ; U5.4@3199.64,776.24 ccw(c3272.32,762.33) 3220,710 ; P3.10@3720.47,530 ccw(c3661.26,530) 3703.13,571.87 ccw(c3745,613.74) P3.10@3745,554.53 ; P3.10@3730.47,530 ccw(c3695.4,530) 3720.2,554.8 ccw(c3745,579.6) P3.10@3745,544.53 ; P3.10 3660,615 3455,615 3360,710 3220,710 ; 3180,750 3220,710
  Bottom Layer w10: v1@2248.64,1246.36 ccw(c2233.27,1261.73) 2255,1261.73 ccw(c2276.73,1261.73) v1@2261.36,1246.36 ; v1(2255,1240) 2255,1320 2295,1360 2395,1360 2595,1160 3100,1160 3180,1080 U5.4 ; U5.4@3165.86,844.14 ccw(c3131.72,878.28) 3180,878.28 ccw(c3228.28,878.28) U5.4@3194.14,844.14
P2.3: U3.11 U4.6 | length 897.3
  Top Layer w10: v1(2280,1150) 2325,1150 2449.69,1274.69 U3.11 ; v1@2286.36,1143.64 cw(c2301.73,1128.27) 2301.73,1150 cw(c2301.73,1171.73) v1@2286.36,1156.36
  Bottom Layer w10: U4.6@2105.86,844.14 ccw(c2071.72,878.28) 2120,878.28 ccw(c2168.28,878.28) U4.6@2134.14,844.14 ; U4.6 2120,1125 2145,1150 v1(2280,1150) ; v1@2273.64,1143.64 ccw(c2258.27,1128.27) 2258.27,1150 ccw(c2258.27,1171.73) v1@2273.64,1156.36
P2.4: P6.2 U3.12 U5.2 | length 2364.5
  Top Layer w10: U3.12 2544.72,1300.28 v1(2645,1200) ; v1@2636,1200 ccw(c2614.27,1200) 2629.64,1215.36 ccw(c2645,1230.73) v1@2645,1209 ; U5.2@3370,780 ccw(c3406.21,780) 3380.61,754.39 ; U5.2@3380,780 ccw(c3440.36,780) 3397.68,737.32 ; U5.2 3380,755 3455,680 3815,680 P6.2 ; U5.2@3390,780 ccw(c3474.5,780) 3414.75,720.25 ; U5.2@3400,780 ccw(c3508.64,780) 3431.82,703.18 ; P6.2@3840.47,630 ccw(c3781.26,630) 3823.13,671.87 ccw(c3865,713.74) P6.2@3865,654.53 ; P6.2@3850.47,630 ccw(c3815.4,630) 3840.2,654.8 ccw(c3865,679.6) P6.2@3865,644.53
  Bottom Layer w10: v1(2645,1200) 3265,1200 3380,1085 U5.2 ; v1@2651.36,1193.64 cw(c2666.73,1178.27) 2666.73,1200 cw(c2666.73,1221.73) v1@2651.36,1206.36 ; U5.2@3365.86,844.14 ccw(c3331.72,878.28) 3380,878.28 ccw(c3428.28,878.28) U5.2@3394.14,844.14
P2.5: U3.13 U4.8 | length 1139
  Top Layer w10: v1(2280,1200) 2320,1200 2445.87,1325.87 U3.13 ; v1@2286.36,1193.64 cw(c2301.73,1178.27) 2301.73,1200 cw(c2301.73,1221.73) v1@2286.36,1206.36
  Bottom Layer w10: U4.8@1905.86,844.14 ccw(c1871.72,878.28) 1920,878.28 ccw(c1968.28,878.28) U4.8@1934.14,844.14 ; U4.8 1920,1160 1960,1200 v1(2280,1200) ; v1@2273.64,1193.64 ccw(c2258.27,1178.27) 2258.27,1200 ccw(c2258.27,1221.73) v1@2273.64,1206.36
P2.6: C14.1 U3.19 U5.6 Y1.1 | length 1748.6
  Top Layer w10: U3.19 2530.59,1479.41 ; 2615.29,1479.41 ccw(c2615.29,1534.71) Y1.1@2654.39,1495.61 ; 2639.43,1479.41 ccw(c2639.43,1510.57) Y1.1@2661.46,1488.54 ; 2642.28,1479.41 cw(c2642.28,1462.28) Y1.1@2654.39,1474.39 ; Y1.1@2675,1500 ccw(c2675,1524.3) 2692.18,1507.12 ; Y1.1@2680,1485 cw(c2703.99,1485) 2687.03,1501.96 ; Y1.1@2690,1485 cw(c2738.13,1485) 2704.1,1519.03 ; v1@2698.64,1106.36 ccw(c2683.27,1121.73) 2705,1121.73 ccw(c2726.73,1121.73) v1@2711.36,1106.36 ; v1(2705,1100) 2705,1305 2530.59,1479.41 ; 2747.32,1562.26 ccw(c2704.64,1604.94) C14.1@2765,1604.94 ; 2759.39,1574.33 cw(c2785,1548.72) C14.1@2785,1584.94 ; 2764.39,1579.33 ccw(c2738.79,1604.94) C14.1@2775,1604.94 ; C14.1 Y1.1 Y1.1 2664.41,1479.41 2530.59,1479.41
  Bottom Layer w10: v1(2705,1100) 2930,1100 2980,1050 U5.6 ; v1@2711.36,1093.64 cw(c2726.73,1078.27) 2726.73,1100 cw(c2726.73,1121.73) v1@2711.36,1106.36 ; U5.6@2965.86,844.14 ccw(c2931.72,878.28) 2980,878.28 ccw(c3028.28,878.28) U5.6@2994.14,844.14
P2.7: C15.1 U3.18 Y1.2 | length 862.2
  Top Layer w10: v1@2429,1495 ccw(c2450.73,1495) 2435.36,1479.64 ; v1(2430,1495) 2430,1485 2461.18,1453.82 U3.18 ; v1@2439,1495 ccw(c2484.87,1495) 2452.44,1462.56 ; Y1.2 2789.06,1309.94 C15.1 ; Y1.2@2675,1414 cw(c2675,1389.86) 2692.07,1406.93 ; Y1.2@2680,1429 ccw(c2704.14,1429) 2687.07,1411.93 ; Y1.2@2690,1429 ccw(c2738.28,1429) 2704.14,1394.86 ; 2747.98,1351.02 cw(c2706.9,1309.94) C15.1@2765,1309.94 ; 2757.8,1341.2 ccw(c2785,1368.41) C15.1@2785,1329.94 ; C15.1@2765.06,1333.94 cw(c2741.05,1309.94) C15.1@2775,1309.94
  Bottom Layer w10: v1(2430,1495) 2604,1495 Y1.2 ; v1@2436.36,1488.64 cw(c2451.73,1473.27) 2451.73,1495 cw(c2451.73,1516.73) v1@2436.36,1501.36 ; 2635.86,1463.14 cw(c2601.72,1429) Y1.2@2650,1429 ; 2647.93,1451.07 ccw(c2665,1468.14) Y1.2@2665,1444 ; 2652.93,1446.07 cw(c2635.86,1429) Y1.2@2660,1429
RESET: C12.2 P4.3 R5.1 RESET.1 U3.16 | length 3404
  Top Layer w10: v1@2348.64,1578.64 cw(c2333.27,1563.27) 2355,1563.27 cw(c2376.73,1563.27) v1@2361.36,1578.64 ; v1(2355,1585) 2355,1475 2427.36,1402.64 U3.16 ; R5.1 3479.16,1799.09 ; R5.1@3390.06,1725 ccw(c3390.06,1761.21) 3415.67,1735.61 ; R5.1@3390.06,1735 ccw(c3390.06,1795.36) 3432.74,1752.68 ; R5.1@3410.06,1715 cw(c3446.28,1715) 3420.67,1740.61 ; 3418.16,1738.1 cw(c3505.06,1651.2) C12.2@3505.06,1774.09 ; 3435.23,1755.17 cw(c3505.06,1685.34) C12.2@3505.06,1784.09 ; 3452.3,1772.24 cw(c3505.06,1719.48) C12.2@3505.06,1794.09 ; 3469.38,1789.31 cw(c3505.06,1753.62) C12.2@3505.06,1804.09 ; C12.2@3485.72,1794.03 ccw(c3479.16,1792.32) 3479.16,1799.09 ; C12.2@3485.72,1804.16 cw(c3479.16,1805.87) 3479.16,1799.09 ; C12.2 3479.16,1799.09
  Top Layer w20: v1(2660,1790) 2755,1790 2805,1740 2900,1740 3030,1610 3030,1455 3085,1400 3350,1400 3405,1455 3405,1525.91 3405,1600 3390.06,1614.94 R5.1 ; R5.1@3379.46,1694.39 cw(c3353.85,1668.79) 3390.06,1668.79 cw(c3426.28,1668.79) R5.1@3400.67,1694.39 ; RESET.1@3390.15,1511.06 cw(c3354.3,1475.21) 3405,1475.21 cw(c3455.7,1475.21) RESET.1@3419.85,1511.06 ; RESET.1@3390.15,1540.75 ccw(c3354.3,1576.6) 3405,1576.6 ccw(c3455.7,1576.6) RESET.1@3419.85,1540.75
  Bottom Layer w10: v1(2355,1585) 2455,1585 ; v1@2361.36,1578.64 cw(c2376.73,1563.27) 2376.73,1585 cw(c2376.73,1606.73) v1@2361.36,1591.36
  Bottom Layer w20: RESET.1@3390.15,1284.85 ccw(c3354.3,1320.7) 3405,1320.7 ccw(c3455.7,1320.7) RESET.1@3419.85,1284.85 ; RESET.1@3390.15,1511.06 cw(c3354.3,1475.21) 3405,1475.21 cw(c3455.7,1475.21) RESET.1@3419.85,1511.06 ; RESET.1@3405,1270 RESET.1@3405,1525.91
  Bottom Layer w30: 2455,1585 v1(2660,1790) P4.3 ; P4.3@2755.47,1900 cw(c2720.4,1900) 2745.2,1875.2 cw(c2770,1850.4) P4.3@2770,1885.47
TEST: P4.2 U3.17 | length 941
  Top Layer w10: v1@2383.64,1543.64 cw(c2368.27,1528.27) 2390,1528.27 cw(c2411.73,1528.27) v1@2396.36,1543.64 ; v1(2390,1550) 2390,1480 2441.77,1428.23 U3.17
  Bottom Layer w10: v1(2390,1550) 2520,1550 2530,1560 ; v1@2396.36,1543.64 cw(c2411.73,1528.27) 2411.73,1550 cw(c2411.73,1571.73) v1@2396.36,1556.36
  Bottom Layer w30: 2530,1560 P4.2 ; P4.2@2855.47,1900 cw(c2820.4,1900) 2845.2,1875.2 cw(c2870,1850.4) P4.2@2870,1885.47
pads on no net: Designator13.1 Designator14.1 Designator15.1 Designator16.1 K1.3 K1.4 K1.5 K1.6 P3.2 P3.3 P3.4 P3.5 P3.6 P3.7 P3.8 P3.9 P6.1 P6.3 P6.4 P6.5 P6.6 P6.7 P6.8 P6.9 U1.6 U2.4 U5.7 U5.8 U5.9 U5.10 Y1.

## Polygon pours and split planes (outlines as drawn)
DVSS on Top Layer "Top Layer-No Net" (solid, remove dead copper, pour order 3): 0,0 3950,0 3950,1975 0,1975
DVSS on Bottom Layer "Top Layer-No Net" (solid, remove dead copper, pour order 5): 3950,0 0,0 0,1975 3950,1975

## Keep-outs
Keep-Out Layer:
  the board outline again, w10

## Other copper
Top Layer:
  region net DVSS: 1495,45 1670,45 1790,165 1700,250
  region net DVCC: 2240,1640 2265,1640 2265,1505 2240,1505
Bottom Layer:
  region net 5.0V: 1795,515 1920,390 1920,360 1895,360 1765,490
  region net 3.3V: 1970,180 1950,180 1950,275 1970,295
  region net P1.1: 2205,415 2165,455 2165,395 2205,355
  region net P1.2: 2355,170 2355,210 2370,225 2385,210 2385,165
  region net NetP5_4: 2825,385 2825,300 2845,280 2860,295 2860,360
  region net TEST: 2495,1545 2535,1545 2555,1565 2515,1565
  region net RESET: 2415,1585 2430,1570 2455,1570 2455,1600 2430,1600
  text "Mr.UP" at 975,390 h60
  text "2016.7.16" at 975,275 h60

## Silkscreen, mask and mechanical layers (free items; w line width, h text height)
Top Overlay:
  text "BB8 control board V1.0" at 430,35 h60